# Altium PCB Time.PcbDoc
Units mil, origin at the board's own origin, x right, y up, seen from the top; angles counter-clockwise.
Board outline 2580.03 x 1455.03 mil, 2 copper layers (Top Layer, Bottom Layer); 42 components, 39 nets, 156 pads, 0 vias.
Unrouted connection lines stored in the file: 22.
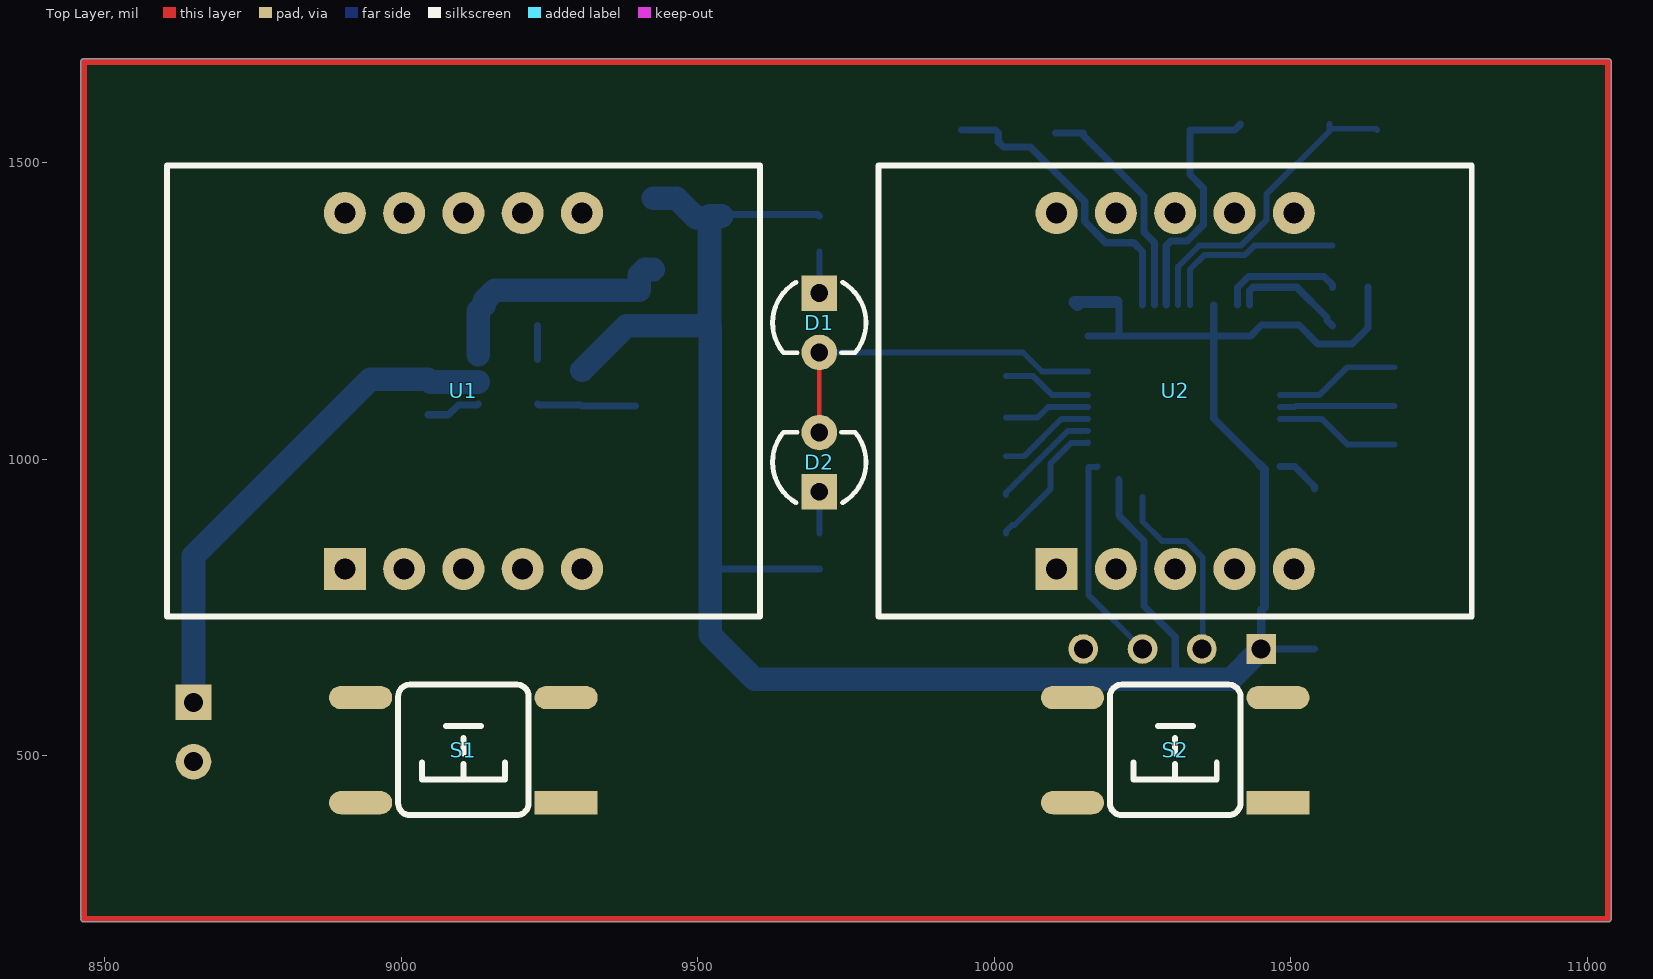
[diagram p0: Top Layer view]
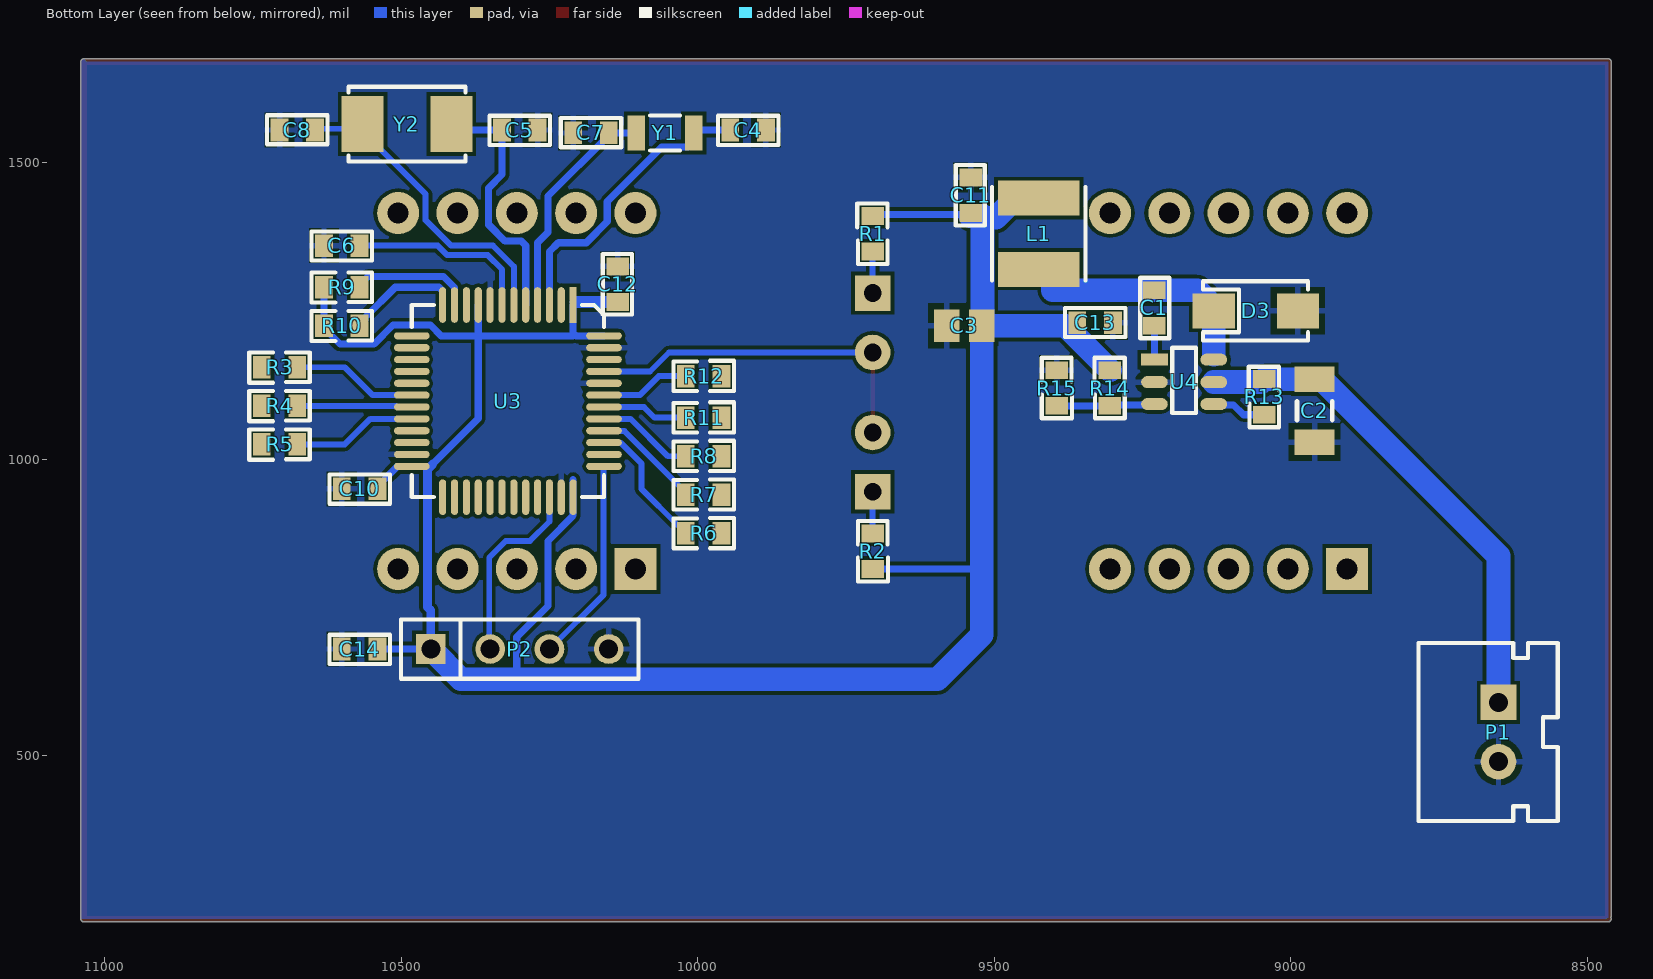
[diagram p1: Bottom Layer view, seen from below]
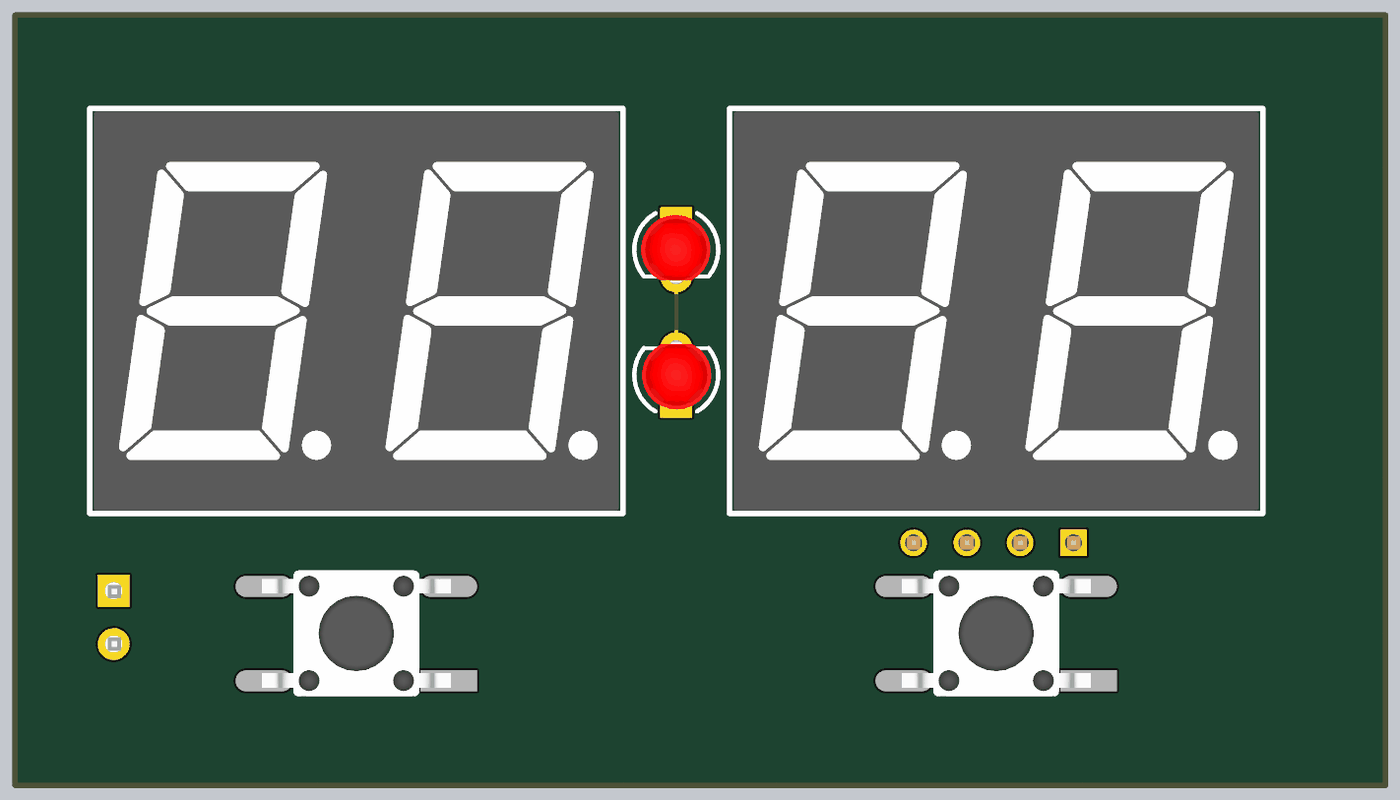
[diagram p2: 3D render of the assembled board from above, using the file's embedded part models]
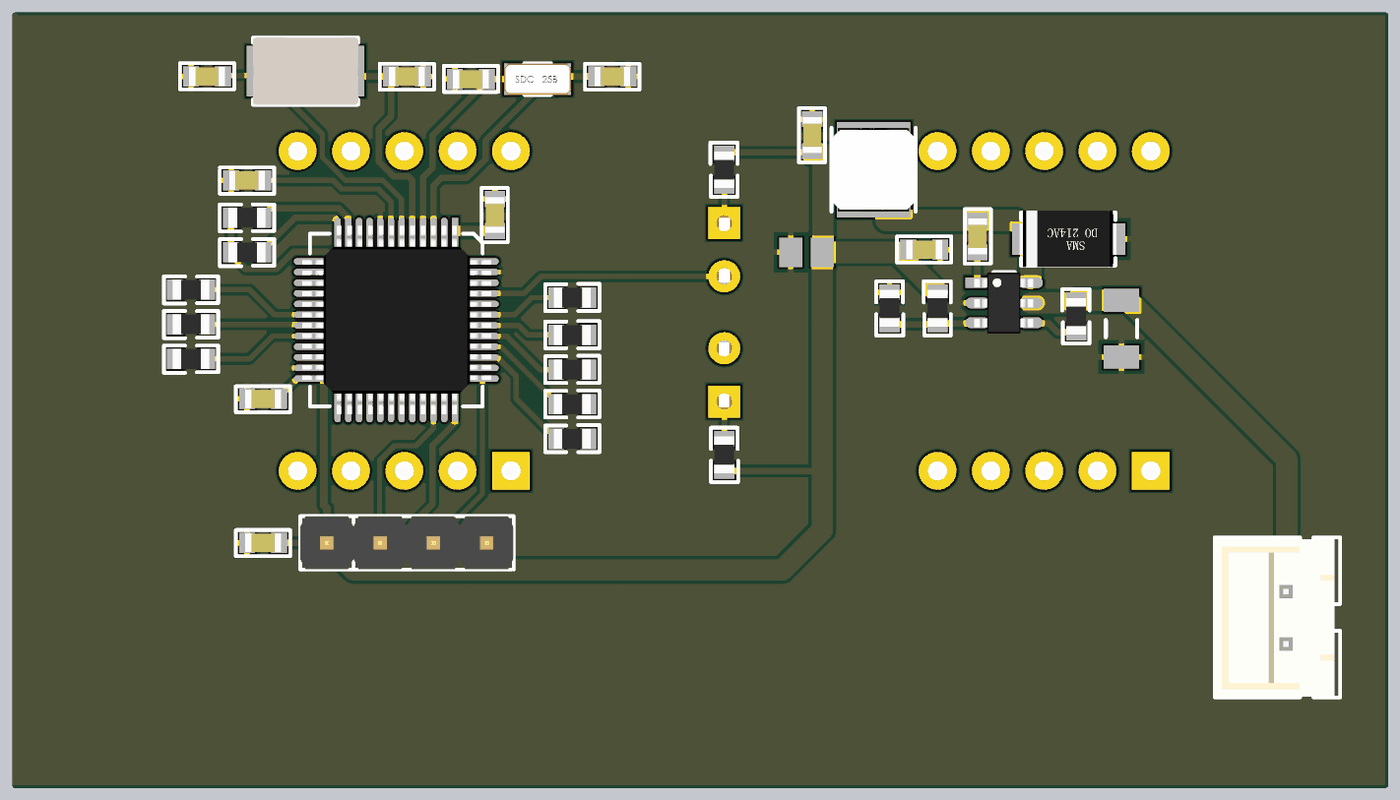
[diagram p3: 3D render of the assembled board from below, using the file's embedded part models]

## Layer stack, top to bottom
Top Solder: solder mask 0.4, Solder Resist, Dk 3.5
Top Layer: signal copper 1.4
Dielectric 1: dielectric 12.6, FR-4, Dk 4.8
Bottom Layer: signal copper 1.4
Bottom Solder: solder mask 0.4, Solder Resist, Dk 3.5

## Board outline
8459.99,230 ccw(c8465,230) 8460.65,227.5 ccw(c8465,225) 8465,219.98 11035,219.99 ccw(c11035,225) 11040.01,225 11040.01,1670 ccw(c11035,1670) 11035,1675.02 8465,1675.02 ccw(c8465,1670) 8459.99,1670

## Design rules (kind name [scope] priority, off if disabled: settings)
Clearance [All] p1: gap=6 ignorepadtopadclearanceinfootprint=FALSE
MinimumSolderMaskSliver [All] p1 off: minsoldermaskwidth=10
PolygonConnect [All] p1: connectstyle=Relief reliefconductorwidth=10 reliefentries=4 polygonreliefangle="90 Angle" airgapwidth=10
RoutingVias [All] p1: holewidth=28 width=50 viastyle="Through Hole" minholewidth=28 minwidth=50 maxholewidth=28 maxwidth=50
SilkToSilkClearance [All] p1 off: silktosilkclearance=10
SilkToSolderMaskClearance [IsPad] p1 off: minsilkscreentomaskgap=10 clearancetoexposedcopper=TRUE
SolderMaskExpansion [All] p1: expansion=4 istentingtop=FALSE
Width [All] p1: maxlimit=100 minlimit=6 preferedwidth=10
27 further rules are at their usual default settings.

## Components (designator, comment, footprint, x,y, rotation, side; value= is the part's Value field where it differs from the comment)
C1 "103" C0603 9230,1225 r90 bottom locked
C2 "475" C1206 8960,1081.85 r90 bottom locked value=100pF
C3 "226" C0805 9550.47,1225 r180 bottom locked value=100pF
C4 "475" C0603 9945,1555 r180 bottom locked
C5 "475" C0603 10330,1555 r180 bottom locked
C6 "104" C0603 10630,1360 r180 bottom locked
C7 "475" C0603 10150,1550 r0 bottom locked
C8 "475" C0603 10645,1555 r0 bottom locked
C10 "104" C0603 10600,950 r180 bottom
C11 "104" C0603 9540,1475 r270 bottom locked
C12 "104" C0603 10135,1325 r270 bottom locked
C13 "104" C0603 9300,1230 r0 bottom locked
C14 "104" C0603 10600,680 r180 bottom
D1 "LED0" LED3MM-RED 9705,1230 r270 top locked
D2 "LED1" LED3MM-RED 9705,995 r90 top locked
D3 "B230A" SMA 8988.27,1250 r0 bottom locked
L1 "4u7H" L4X4 9425,1320 r90 bottom locked
P1 "Header 2" XH2P54P2 8650,590 r180 bottom locked
P2 "Header 4" SIP4 10450,680 r180 bottom
R1 "360R" R0603 9705,1350 r90 bottom locked value=1K
R2 "360R" R0603 9705,875 r270 bottom locked value=1K
R3 "360R" R0603 10675,1155 r0 bottom locked value=1K
R4 "360R" R0603 10675,1090 r0 bottom locked value=1K
R5 "360R" R0603 10675,1025 r0 bottom locked value=1K
R6 "360R" R0603 10020,875 r180 bottom locked value=1K
R7 "360R" R0603 10020,940 r180 bottom locked value=1K
R8 "360R" R0603 10020,1005 r180 bottom locked value=1K
R9 "360R" R0603 10570,1290 r0 bottom locked value=1K
R10 "360R" R0603 10570,1225 r0 bottom locked value=1K
R11 "360R" R0603 10020,1070 r180 bottom locked value=1K
R12 "360R" R0603 10020,1140 r180 bottom locked value=1K
R13 "100K" R0603 9045,1075 r90 bottom locked
R14 "49K9" R0603 9305,1090 r90 bottom locked value=1K
R15 "16K2" R0603 9395,1150 r270 bottom locked value=1K
S1 "click" "TSW SMD-6*6*5" 9105,510 r180 top locked
S2 "click" "TSW SMD-6*6*5" 10305,510 r180 top locked
U1 "LED_7" "SMG 0.56-2P" 9105,1115 r0 top locked
U2 "LED_7" "SMG 0.56-2P" 10305,1115 r0 top locked
U3 "STM32F103C8TX" PQFP48 10210.2,1259.83 r270 bottom locked
U4 "MP2359" SOT23-6 9229.83,1167.8 r180 bottom locked
Y1 "32768" FC-135 10055,1550 r180 bottom locked
Y2 "8M" CY5032 10565,1565 r180 bottom locked

## Footprints (in the part's own frame and the unit in brackets; to place one, negate y for a bottom-side part, rotate by r counter-clockwise, add the part's x,y. Pads: shape width x height; smd on the part's side, far side on the other; paste and mask are expansions set on the pad)
C0603 [mil]
  rect 30x38 smd: 1(0,0) 2(60,0)
  silkscreen extent -21,-25 81,24, body extent -3,-18 63,18, height 35
C0805 [mm] "Chip Capacitor, Body 2.0x1.3mm, IPC High Density"
  rect 1.1x1.4 smd: 1(-0.75,0) 2(0.75,0)
  body extent -1.1,-0.72 1.1,0.72, height 1.4
C1206 [mm] "Chip Capacitor, Body 3.2x1.6mm, IPC High Density"
  rect 1.1x1.7 smd: 1(-1.35,0) 2(1.35,0)
  silkscreen extent -0.4,-0.75 0.4,0.75, body extent -1.7,-0.9 1.7,0.9, height 1.3
CY5032 [mm]
  rect 1.8x2.4 smd: 1(0,0) 2(3.8,0)
  silkscreen extent -0.6,-1.6 4.4,1.6, body extent -0.59,-1.6 4.41,1.6, height 1.23
FC-135 [mm]
  rect 0.75x1.5 smd: 1(-1.225,0) 2(1.225,0)
  silkscreen extent -0.64,-0.75 0.64,0.75, body extent -1.6,-0.75 1.6,0.75
L4X4 [mm]
  rect 1.5x3.5 smd: 1(0,0) 2(3.048,0)
  silkscreen extent -0.48,-2 3.52,2, body extent -0.48,-2 3.52,2, height 1.02
LED3MM-RED [mil]
  rect 60x60 hole 30: 1(-50,0)
  round 60 hole 30: 2(50,0)
  silkscreen extent -68,-79 50,79, body extent -65,-66 61,64, height 184
PQFP48 [mil]
  rect 60x12 smd: 1(-0.17,0.2)
  oval 60x12 smd: 2(-0.17,-19.8) 3(-0.17,-39.8) 4(-0.17,-59.8) 5(-0.17,-79.8) 6(-0.17,-99.8) 7(-0.17,-119.8) 8(-0.17,-139.8) 9(-0.17,-159.8) 10(-0.17,-179.8) 11(-0.17,-199.8) 12(-0.17,-219.8) 25(323.83,-219.8) 26(323.83,-199.8) 27(323.83,-179.8) 28(323.83,-159.8) 29(323.83,-139.8) 30(323.83,-119.8) 31(323.83,-99.8) 32(323.83,-79.8) 33(323.83,-59.8) 34(323.83,-39.8) 35(323.83,-19.8) 36(323.83,0.2)
  oval 12x60 smd: 13(51.83,-271.8) 14(71.83,-271.8) 15(91.83,-271.8) 16(111.83,-271.8) 17(131.83,-271.8) 18(151.83,-271.8) 19(171.83,-271.8) 20(191.83,-271.8) 21(211.83,-271.8) 22(231.83,-271.8) 23(251.83,-271.8) 24(271.83,-271.8) 37(271.83,52.2) 38(251.83,52.2) 39(231.83,52.2) 40(211.83,52.2) 41(191.83,52.2) 42(171.83,52.2) 43(151.83,52.2) 44(131.83,52.2) 45(111.83,52.2) 46(91.83,52.2) 47(71.83,52.2) 48(51.83,52.2)
  silkscreen extent 0,-272 324,52, body extent -15,-286 339,68, height 57
R0603 [mil]
  rect 30x38 smd: 1(0,0) 2(60,0)
  silkscreen extent -21,-25 81,26, body extent -4,-19 64,19, height 22
SIP4 [mil]
  rect 50x50 hole 32: 1(0,0)
  round 50 hole 32: 2(100,0) 3(200,0) 4(300,0)
  silkscreen extent -50,-50 350,50, body extent -50,-50 350,50, height 337
SMA [mm]
  rect 1.8x1.5 smd: 1(0,0) 2(3.6,0)
  silkscreen extent -0.43,-1.27 4.07,1.27, body extent -0.47,-1.35 4.13,1.35, height 2.4
"SMG 0.56-2P" [mm] "25*19*8mm(长宽厚)"
  rect 1.8x1.8 hole 0.9: 1(-5.08,-7.62)
  round 1.8 hole 0.9: 2(-2.54,-7.62) 3(0,-7.62) 4(2.54,-7.62) 5(5.08,-7.62) 6(5.08,7.62) 7(2.54,7.62) 8(0,7.62) 9(-2.54,7.62) 10(-5.08,7.62)
  silkscreen extent -12.7,-9.65 12.7,9.65, body extent -12.5,-9.5 12.5,9.5, height 8
SOT23-6 [mil]
  rect 45x20 smd: 1(-0.17,0.2)
  oval 45x20 smd: 2(-0.17,-37.8) 3(-0.17,-74.8) 4(99.83,-74.8) 5(99.83,-37.8) 6(99.83,0.2)
  silkscreen extent 30,-90 70,20, body extent -6,-95 104,19, height 57
"TSW SMD-6*6*5" [mm] "6*6*5mm"
  rect 2.7x1 smd: 1(-4.4,2.261)
  oval 2.7x1 smd: 2(-4.4,-2.239) 3(4.4,-2.239) 4(4.4,2.261)
  silkscreen extent -2.79,-2.79 2.79,2.79, body extent -4.5,-3 4.5,3, height 4.95
XH2P54P2 [mil]
  rect 60x60 hole 32: 1(0,0)
  round 60 hole 32: 2(0,-100)
  silkscreen extent -135,-200 100,100, body extent -135,-198 89,97, height 276

## Part data
C1 C2 C3 C4 C5 C6 C7 C8 C10 C11 C12 C13 C14: library part Cap, "Capacitor", LatestRevisionDate=17-Jul-2002, LatestRevisionNote="Re-released for DXP Platform.", PackageDescription="Radial Cap, Thru-Hole; 2 Leads; 0.3 in Pin Spacing", PackageReference=RAD-0.3, Published=8-Jun-2000, Publisher="Altium Limited"
D1: "Typical INFRARED GaAs LED", LatestRevisionDate=08-Jul-2005, LatestRevisionNote="Mech Layer 1 removed.", PackageDescription="LED; 2 Leads", PackageReference=LED-0, Published=8-Jun-2000, Publisher="Altium Limited"
D2: library part LED0, "Typical INFRARED GaAs LED", LatestRevisionDate=08-Jul-2005, LatestRevisionNote="Mech Layer 1 removed.", PackageDescription="LED; 2 Leads", PackageReference=LED-0, Published=8-Jun-2000, Publisher="Altium Limited"
D3: library part "D Schottky", "Schottky Diode", Code_JEDEC=DO-214-AA, LatestRevisionDate=17-Jul-2002, LatestRevisionNote="Re-released for DXP Platform.", PackageDescription="DO-214-AA/SMB; 2 C-Bend Leads; Body 5.3 x 3.6 mm, inc. leads (LxW)", PackageReference=SMB, Published=8-Jun-2000, Publisher="Altium Limited"
L1: library part Inductor, "Inductor", Code_IEC=1005, Code_JEITA=0402, LatestRevisionDate=29-May-2009, LatestRevisionNote="IPC-7351 Footprint Added.", PackageDescription="Chip Inductor", PackageReference=0402-A, Published=8-Jun-2000, Publisher="Altium Limited"
P1: "Header, 2-Pin", LatestRevisionDate=17-Jul-2002, LatestRevisionNote="Re-released for DXP Platform.", Publisher="Altium Limited"
P2: "Header, 4-Pin", LatestRevisionDate=17-Jul-2002, LatestRevisionNote="Re-released for DXP Platform.", Publisher="Altium Limited"
R1 R2 R3 R4 R5 R6 R7 R8 R9 R10 R11 R12 R13 R14 R15: library part Res2, "Resistor", LatestRevisionDate=17-Jul-2002, LatestRevisionNote="Re-released for DXP Platform.", PackageDescription="Axial Device, Thru-Hole; 2 Leads; 0.4 in Pin Spacing", PackageReference=AXIAL-0.4, Published=8-Jun-2000, Publisher="Altium Limited"
U3: library part Component_1
Y1 Y2: library part XTAL, "Crystal Oscillator", LatestRevisionDate=17-Jul-2002, LatestRevisionNote="Re-released for DXP Platform.", PackageDescription="Crystal, Thru-Hole; 2 Leads; Body 3.1 x 8.2 mm (Dia.xH)", PackageReference=R38, Published=8-Jun-2000, Publisher="Altium Limited"

## Nets (pads, with @x,y where several pads share a name; then routed paths per layer and width w, separated by ;. In a path a pad name is that pad's centre, name@x,y a point inside that pad or via, vN(x,y) a via of type N, cw(c..) or ccw(c..) an arc to the next point about the centre after c; other vN are vias at no path point)
3V3: C3.2 C10.2 C11.2 C12.2 C13.2 C14.2 L1.2 P2.1 R1.2 R2.2 R9.2 R10.2 R14.2 U3.1 U3.9 U3.24 U3.36 U3.48 | length 4272.2
  Bottom Layer w12: 9520.94,815 R2.2 ; C11.2 9542.5,1412.5 9702.5,1412.5 R1.2 ; U3.48 10205,1208 10210,1213 U3.1 ; U3.36@10210,965.46 U3.36 10210,904.8 10252.43,862.37 10252.43,752.57 10305,700 10305,629 ; 10210,1208 10368,1208 10370,1210 ; U3.9 10370,1210 ; 10446.71,991.71 10370,1068.42 10370,1208 ; P2.1 C14.2 ; U3.24 10506,988 10540,954 C10.2 ; R9.2 R10.2 10630,1221 10603,1194 10545.46,1194 10513.46,1226 10450.54,1226 10432.54,1208 10370,1208 ; 10370,1208 10370,1210
  Bottom Layer w15: 10446.71,991.71 10455.86,982.57 10455.86,750.86 10450,745 P2.1
  Bottom Layer w20: C12.2@10140,1260 C12.2 U3.1@10206,1265
  Bottom Layer w40: R14.2 9380,1225 C3.2 ; L1.2 9464.37,1440 9497.33,1407.04 9519.9,1407.04 9519.9,1226.05 C3.2 ; 9519.9,1410 C11.2@9540,1410 ; P2.1 10399,629 10305,629 9596,629 9520.94,704.06 9520.94,815 C3.2
A: R3.1 U3.18 | length 212.5
  Bottom Layer w10: U3.18 10548,1108 10595,1155 R3.1
B: R4.1 U3.19 | length 193.8
  Bottom Layer w10: U3.19 10506.54,1088 10508.54,1090 R4.1
C: R5.1 U3.20 | length 210.8
  Bottom Layer w10: U3.20 10552,1068 10595,1025 R5.1
D: R6.1 U3.39 | length 228.9
  Bottom Layer w10: R6.1 10020,879 10030,889 10034,889 10095,950 10095,993.04 10129.58,1027.62 10157.62,1027.62 U3.39
E: R7.1 U3.40 | length 185.1
  Bottom Layer w10: R7.1 10020,944 10123.62,1047.62 10157.62,1047.62 U3.40
F: R8.1 U3.41 | length 164.1
  Bottom Layer w10: R8.1 10050.23,1005 10113,1067.77 10157.77,1067.77 U3.41
G: R11.1 U3.42 | length 145.5
  Bottom Layer w10: R11.1 10072.73,1070 10090.73,1088 U3.42
GND: C2.1 C3.1 C4.2 C5.2 C6.1 C7.2 C8.2 C10.1 C11.1 C12.1 C13.1 C14.1 D3.1 P1.2 P2.4 R15.1 U3.8 U3.23 U3.35 U3.44 U3.47 U4.2
K1: U3.27
K2: U3.26
K3: U3.25
K4: U3.22
KEY0: R9.1 U3.11 | length 206.9
  Bottom Layer w12: U3.11 10410,1289.46 10428.54,1308 10556,1308 10570,1294 R9.1
KEY1: R10.1 U3.12 | length 196.3
  Bottom Layer w12: U3.12 10430,1284 10436,1290 10510,1290 10561,1239 10561,1234 R10.1
LIGHT: D1.2 D2.2 U3.45 | length 626.3
  Top Layer w7: D2.2@9705,1020 D2.2 D1.2
  Bottom Layer w10: D1.2 10048.36,1180 10080.36,1148 U3.45
NetC1_1: C1.1 U4.1 | length 57
  Bottom Layer w12: U4.1 C1.1
NetC1_2: C1.2 D3.2 L1.1 U4.6 | length 417
  Bottom Layer w40: U4.6@9130,1176 D3.2 9130.47,1250 9140,1259.53 9140,1266.57 9158.43,1285 C1.2 9401.57,1285 9401.57,1310.47 9411.1,1320 L1.1
NetC6_2: C6.2 U3.7 | length 316.6
  Bottom Layer w10: U3.7 10330,1320 10354,1344 10422.29,1344 10438.29,1360 C6.2
NetD1_1: D1.1 R1.1 | length 70
  Bottom Layer w10: D1.1 R1.1
NetD2_1: D2.1 R2.1 | length 70
  Bottom Layer w10: R2.1 D2.1
NetR3_2: R3.2
NetR4_2: R4.2
NetR5_2: R5.2
NetR6_2: R6.2
NetR7_2: R7.2
NetR8_2: R8.2
NetR11_2: R11.2
NetR12_2: R12.2
NetR13_1: R13.1 U4.4 | length 92.5
  Bottom Layer w12: R13.1 9080,1075 9096.47,1091.47 9128.47,1091.47 U4.4
NetR14_1: R14.1 R15.2 U4.3 | length 166.2
  Bottom Layer w12: U4.3 9231.5,1091.5 9303.5,1091.5 R14.1 R15.2
OSC_IN: C5.1 U3.5 Y2.2 | length 435.9
  Bottom Layer w12: U3.5 10290,1360.54 10297.03,1367.57 10324.65,1367.57 10352.43,1395.35 10352.43,1457.46 10330,1479.89 C5.1 10405.39,1555 Y2.2
OSC_OUT: C8.1 U3.6 Y2.1 | length 533
  Bottom Layer w10: U3.6 10310,1325 10345,1360 10415.67,1360 10458.57,1402.9 10458.57,1446.76 10565,1553.19 Y2.1@10565,1557.08 ; Y2.1 Y2.1@10565,1557.08 ; C8.1 10643.38,1557.08 Y2.1@10565,1557.08
P: R12.1 U3.43 | length 151.3
  Bottom Layer w10: R12.1 10065.73,1140 10097.73,1108 U3.43
PC14-OSC32_IN(5): C4.1 U3.3 Y1.2 | length 508.6
  Bottom Layer w12: C4.1 10001.77,1555 Y1.2 10006.77,1535.24 10015.54,1526.47 10060.61,1526.47 10152.43,1434.65 10152.43,1400.49 10187.92,1365 10235,1365 10250,1350 U3.3
"PC15- OSC32_OUT(5)": C7.1 U3.4 Y1.1 | length 386.5
  Bottom Layer w12: Y1.1 C7.1 10150,1546 10252.43,1443.57 10252.43,1382.57 10270,1365 U3.4
SYS_JTCK_SWCLK: P2.3 U3.37 | length 360.8
  Bottom Layer w10: U3.37@10174.08,988 10173.15,987.08 10158.57,987.08 10158.57,771.43 P2.3
SYS_JTMS_SWDIO: P2.2 U3.34 | length 322.4
  Bottom Layer w10: U3.34 10250,895 10282.91,862.09 10323.57,862.09 10351.43,834.23 10351.43,681.43 P2.2
VCC: C2.2 P1.1 R13.2 U4.5 | length 852.4
  Bottom Layer w40: P1.1 8650,836.81 8948.19,1135 C2.2 R13.2 9050,1130 U4.5
pads on no net: S1.1 S1.2 S1.3 S1.4 S2.1 S2.2 S2.3 S2.4 U1.1 U1.2 U1.3 U1.4 U1.5 U1.6 U1.7 U1.8 U1.9 U1.10 U2.1 U2.2 U2.3 U2.4 U2.5 U2.6 U2.7 U2.8 U2.9 U2.10 U3.2 U3.10 U3.13 U3.14 U3.15 U3.16 U3.17 U3.21 U3.28 U3.29 U3.30 U3.31 U3.32 U3.33 U3.38 U3.46
copper on no net: | length 8025
  Top Layer w10: 8465,225 11035,225 11035,1670 8465,1670 8465,230

## Polygon pours and split planes (outlines as drawn)
GND on Bottom Layer "GND_L02_P008" (solid, pour order 8): 8465,1670 11030,1670 11035,1675 11040,1670 11040,225 8470,225 8465,220
GND on Bottom Layer "GND_L02_P000" (solid, pour order 0): 8465,1670

## Other copper
Bottom Layer:
  pour cut-out: 8465,1670